# Allegro board fpga_board.brd
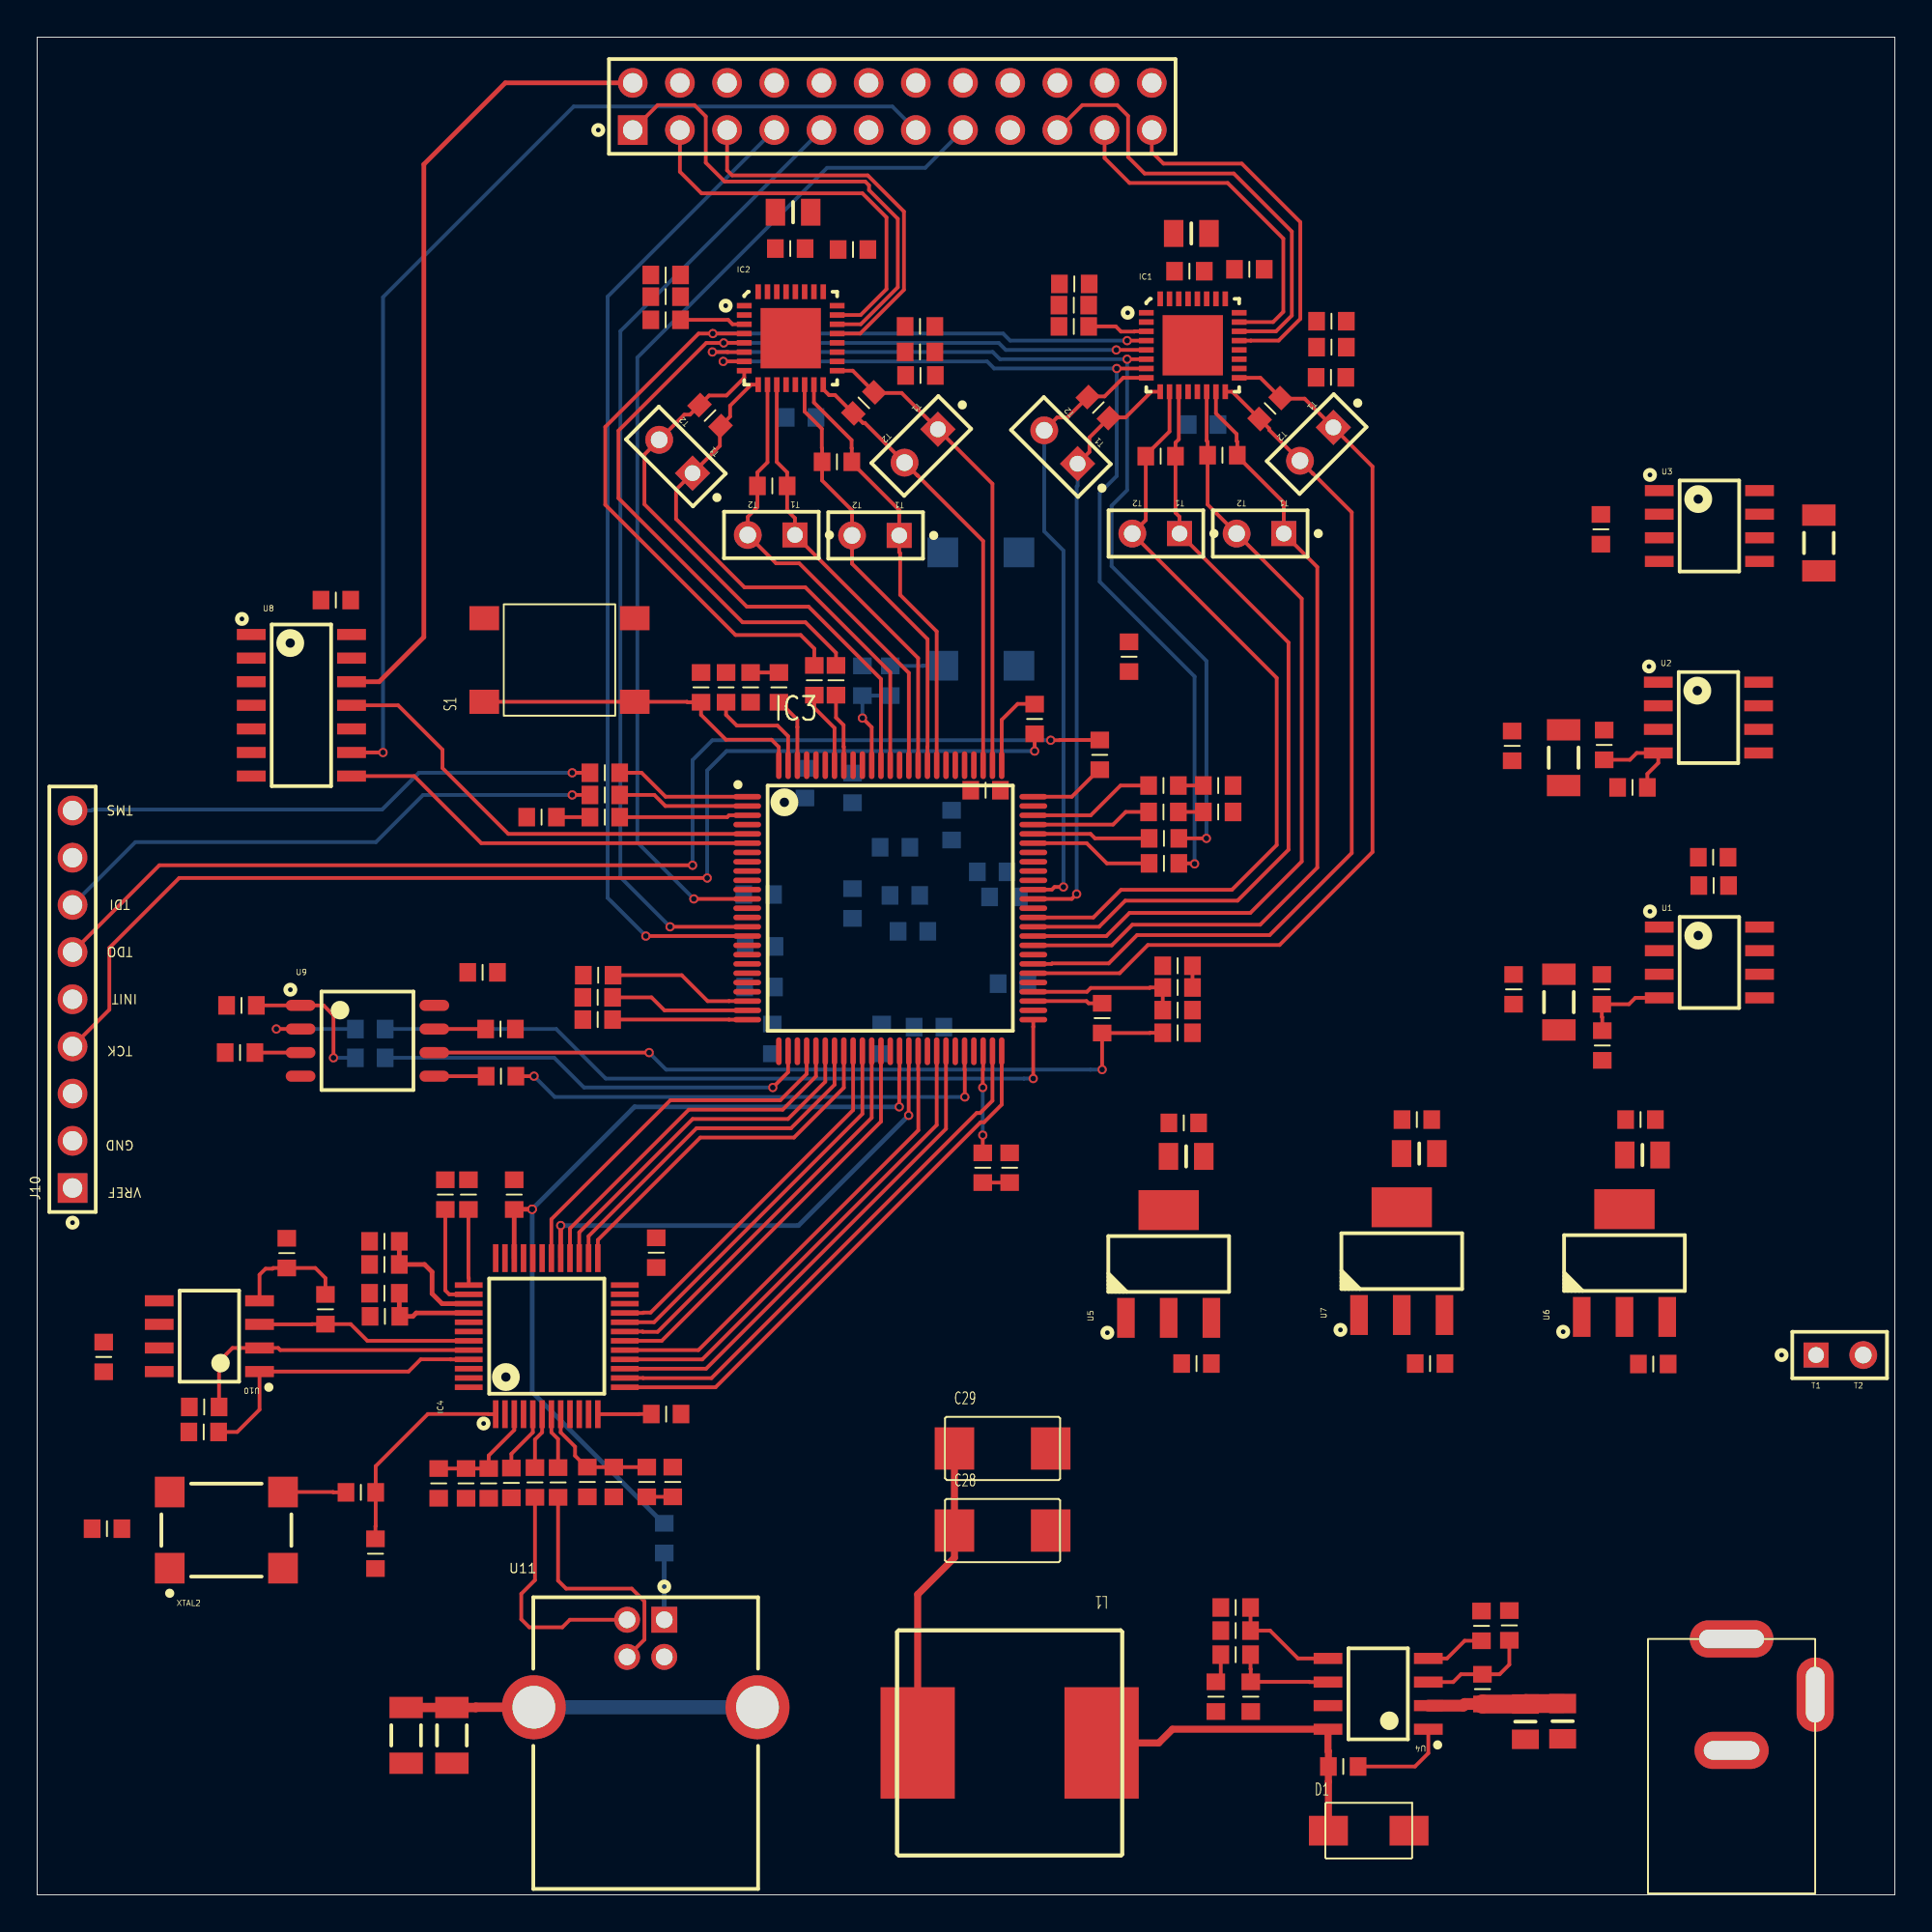
[diagram p0: board, top side]
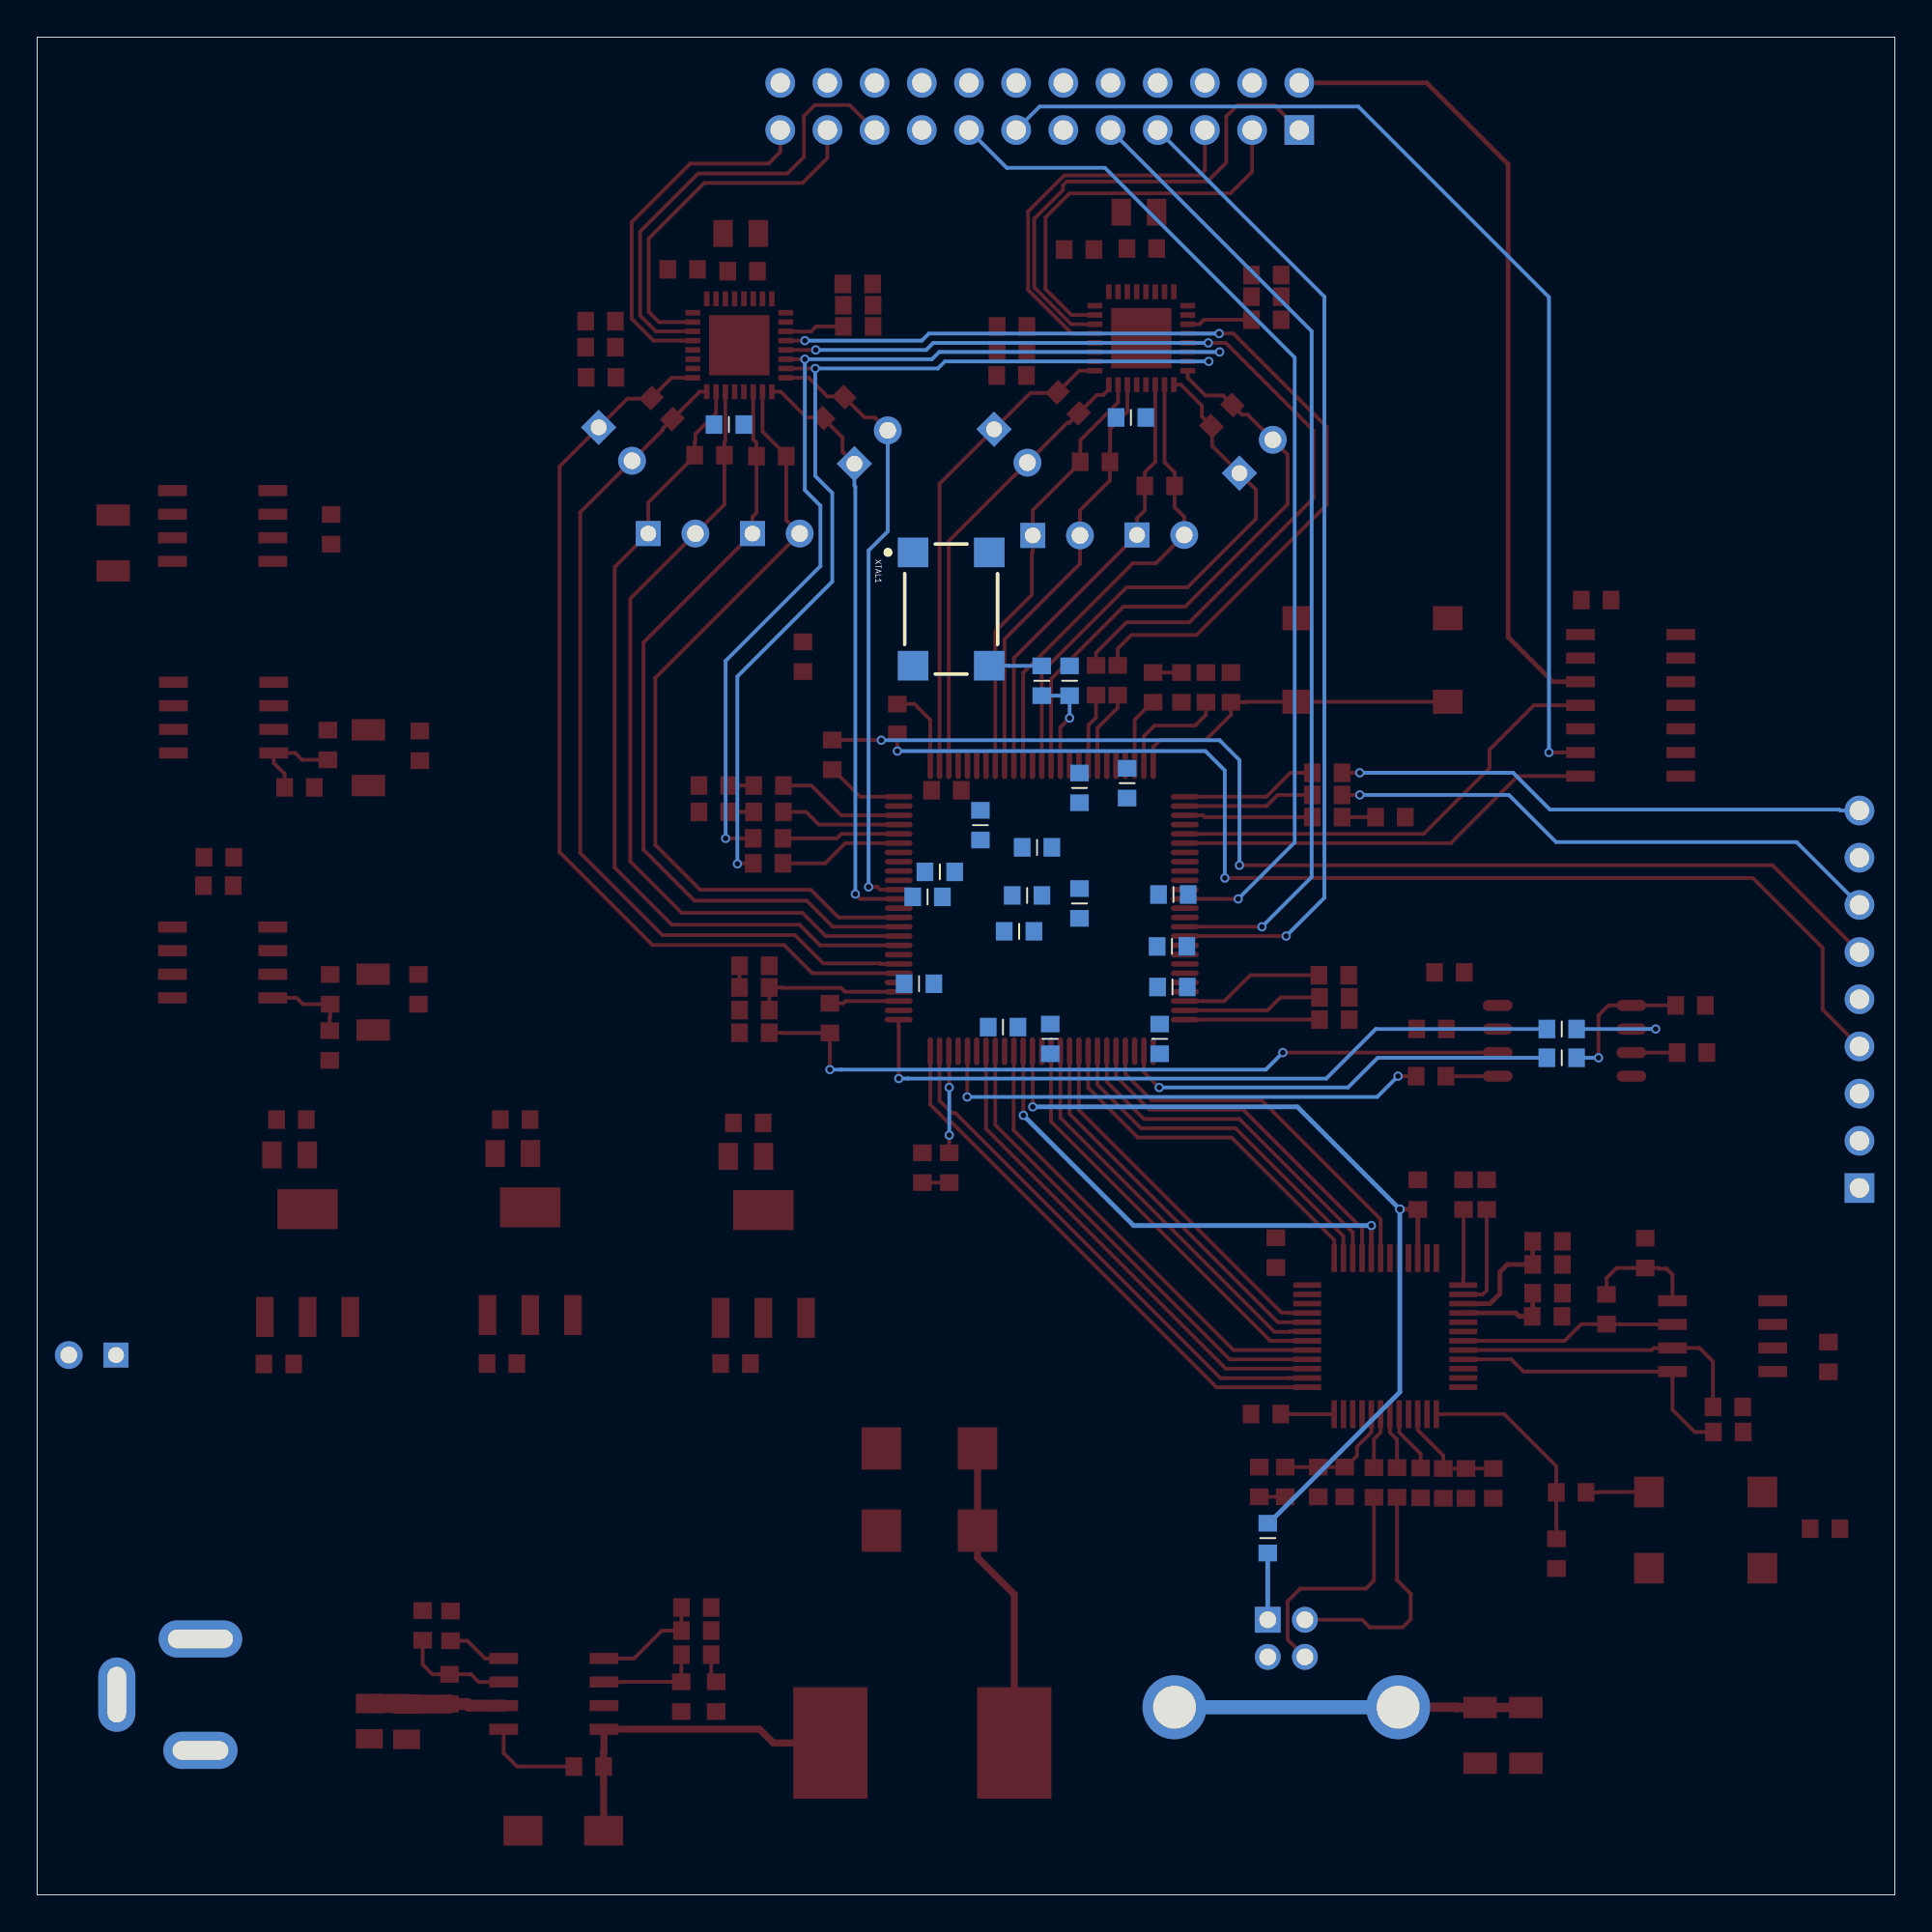
[diagram p1: board, bottom side, seen from below]

Outline 100 x 100 mm; copper layers: TOP, BOTTOM. Coordinates in mm from the lower left corner of the outline.
Outline path: 0,100 0,0 100,0 100,100 0,100

## Design rules (mm)
nets with their own width: min track width 0.254; nets VCC1V2 VCC1V8 VCC3V3 VCC5 VCC5A VCC7A VCC12 VREF4

## Placement (name value [footprint] x y rotation side)
C1  10uF  [0805]  62.13 89.43 0 top
C2  0.1uF  [0603]  62.03 87.4 0 top
C3  0.1uF  [0603]  65.25 87.5 0 top
C4  0.1uF  [0603]  55.83 86.72 0 top
C5  0.1uF  [0603]  55.8 85.57 0 top
C6  0.1uF  [0603]  69.67 84.71 180 top
C7  0.1uF  [0603]  69.67 83.31 180 top
C8  0.1uF  [0603]  69.65 81.69 0 top
C9  0.1uF  [0603]  62.76 79.15 0 bottom
C10  10uF  [0805]  40.69 90.58 0 top
C11  0.1uF  [0603]  40.54 88.62 0 top
C12  0.1uF  [0603]  43.92 88.57 0 top
C13  0.1uF  [0603]  33.83 87.2 0 top
C14  0.1uF  [0603]  33.83 86.03 0 top
C15  0.1uF  [0603]  47.52 84.43 180 top
C16  0.1uF  [0603]  47.52 83.06 180 top
C17  0.1uF  [0603]  47.55 81.79 0 top
C18  0.1uF  [0603]  41.12 79.53 0 bottom
C19  100pF  [0603]  90.22 55.85 180 top
C20  0.1uF  [0603]  90.25 54.33 180 top
C21  22uF  [1206]  81.92 48.06 270 top
C22  0.1uF  [0603]  79.48 48.74 270 top
C23  22uF  [1206]  82.17 61.21 270 top
C24  1uF  [0603]  79.4 61.85 270 top
C25  0.1uF  [0603]  84.18 73.51 270 top
C26  22uF  [1206]  95.91 72.77 270 top
C27  0.1uF  [0603]  70.31 6.91 180 top
C28  100uF  [6032]  51.97 19.61 0 top
C29  100uF  [6032]  51.97 24.03 0 top
C30  10uF  [0805]  80.11 9.32 270 top
C31  10uF  [0805]  82.12 9.35 270 top
C32  68pF  [0603]  65.33 10.67 270 top
C33  2.2nF  [0603]  64.52 12.93 180 top
C34  0.1uF  [0603]  77.75 14.48 90 top
C35  0.1uF  [0603]  62.41 28.6 180 top
C36  0.1uF  [0603]  87 28.57 180 top
C37  10uF  [0805]  61.85 39.75 0 top
C38  100uF  [0603]  61.72 41.55 0 top
C39  10uF  [0805]  86.41 39.83 0 top
C40  100uF  [0603]  86.31 41.73 0 top
C41  0.1uF  [0603]  74.98 28.6 180 top
C42  10uF  [0805]  74.4 39.9 0 top
C43  100uF  [0603]  74.27 41.73 0 top
C44  0.1uF  [0603]  16.08 69.7 180 top
C45  0.1uF  [0603]  44.42 65.35 90 bottom
C46  0.1uF  [0603]  58.78 66.65 90 top
C47  0.1uF  [0603]  23.98 49.66 0 top
C48  0.1uF  [0603]  38.84 53.85 180 bottom
C49  0.1uF  [0603]  39.57 46.08 270 bottom
C50  0.1uF  [0603]  48.01 46.71 180 bottom
C51  4.7uF  [0603]  43.89 53.37 270 bottom
C52  0.1uF  [0603]  51.41 55.07 180 bottom
C53  0.1uF  [0603]  51.05 59.46 0 top
C54  0.1uF  [0603]  41.33 59.84 90 bottom
C55  4.7uF  [0603]  46.71 53.8 180 bottom
C56  0.1uF  [0603]  38.89 48.87 180 bottom
C57  0.1uF  [0603]  52.53 49.05 180 bottom
C58  0.1uF  [0603]  43.89 59.59 270 bottom
C59  4.7uF  [0603]  46.18 56.39 180 bottom
C60  0.1uF  [0603]  38.91 51.05 180 bottom
C61  0.1uF  [0603]  45.47 46.08 270 bottom
C62  0.1uF  [0603]  52.07 53.72 0 bottom
C63  0.1uF  [0603]  49.23 57.58 270 bottom
C64  4.7uF  [0603]  47.14 51.87 180 bottom
C65  0.1uF  [0603]  3.58 28.96 270 top
C66  0.1uF  [0603]  29.62 22.23 270 top
C67  4.7uF  [0603]  31.04 22.23 270 top
C68  4.7uF  [0603]  24.31 22.15 270 top
C69  0.1uF  [0603]  23.09 22.15 270 top
C70  0.1uF  [0603]  33.86 25.88 0 top
C71  0.1uF  [0603]  33.32 34.57 90 top
C72  0.1uF  [0603]  34.21 22.23 90 top
C73  4.7uF  [0603]  18.72 31.14 180 top
C74  0.1uF  [0603]  18.69 32.38 180 top
C75  4.7uF  [0603]  18.69 33.93 180 top
C76  0.1uF  [0603]  18.69 35.18 180 top
C77  0.1uF  [0603]  23.22 37.69 90 top
C78  0.1uF  [0603]  21.97 37.69 90 top
C79  100nF  [1206]  19.86 8.59 90 top
C80  0.1uF  [0603]  18.21 18.36 270 top
C81  0.1uF  [0603]  3.76 19.71 180 top
D1  DIODE  [SMA]  71.68 3.45 0 top
D2  DIODE  [0603]  39.93 65 90 top
D3  DIODE  [0603]  60.63 59.72 0 top
D4  DIODE  [0603]  60.63 58.29 0 top
D5  DIODE  [0603]  30.56 58.01 180 top
D6  LED  [0603]  50.9 39.14 270 top
D7  LED  [0603]  61.39 50.01 0 top
IC1  ad7961  [AD7961]  62.2 83.41 0 top
IC2  ad7961  [AD7961]  40.56 83.79 0 top
IC3  XC3S200A-VQ100  [XCS200A]  45.92 53.11 0 top
IC4  ft232h  [FT232H]  27.43 30.07 90 top
J1  header1  [P12]  69.77 78.99 225 top
J2  header1  [P12]  56.01 77.04 135 top
J3  header1  [P12]  61.49 73.28 180 top
J4  header1  [P12]  67.11 73.28 180 top
J5  header1  [P12]  48.49 78.89 225 top
J6  header1  [P12]  35.28 76.53 135 top
J7  header1  [P12]  40.79 73.2 180 top
J8  p2l12  [P2L12]  32.06 95 0 top
J9  header1  [P12]  46.41 73.18 180 top
J10  jtag  [JTAG]  1.91 38.05 90 top
J11  header1  [P12]  95.76 29.06 0 top
L1  6.8uH  [INDU127]  52.35 8.18 180 top
L2  600mOhm  [0603]  32.82 22.23 90 top
L3  600mOhm  [0603]  21.62 22.15 90 top
P1  dc12  [DC12]  91.21 0.08 90 top
R1  0R  [0603]  55.8 84.43 180 top
R2  100R  [0603]  66.37 80.01 225 top
R3  100R  [0603]  57.12 80.06 315 top
R4  100R  [0603]  60.48 77.44 0 top
R5  100R  [0603]  63.8 77.5 0 top
R6  0R  [0603]  33.83 84.79 180 top
R7  100  [0603]  44.5 80.31 225 top
R8  100R  [0603]  36.22 79.63 315 top
R9  100R  [0603]  39.57 75.84 0 top
R10  100R  [0603]  43.05 77.14 0 top
R11  2.16K  [0603]  84.23 48.74 270 top
R12  3.3K  [0603]  84.35 61.9 270 top
R13  10K  [0603]  84.25 45.72 270 top
R14  10K  [0603]  85.88 59.61 180 top
R15  348K  [0603]  77.8 11.07 90 top
R16  10K  [0603]  64.52 15.47 0 top
R17  15K  [0603]  63.45 10.67 270 top
R18  76.8K  [0603]  79.25 14.5 90 top
R19  1.87K  [0603]  64.52 14.22 180 top
R20  1K  [0603]  38.4 65 90 top
R21  1K  [0603]  63.58 59.72 180 top
R22  1K  [0603]  63.58 58.29 180 top
R23  0R  [0603]  41.83 65.38 90 top
R24  0R  [0603]  60.66 56.87 0 top
R25  0R  [0603]  43 65.38 90 top
R26  0R  [0603]  60.66 55.52 0 top
R27  1K  [0603]  27.15 58.01 0 top
R28  R  [0603]  45.92 65.35 270 bottom
R29  10K  [0603]  30.2 49.5 0 top
R30  10K  [0603]  30.18 48.31 0 top
R31  10K  [0603]  30.18 47.12 0 top
R32  10K  [0603]  10.92 45.34 0 top
R33  10K  [0603]  11 47.88 0 top
R34  10K  [0603]  24.94 46.61 0 top
R35  33R  [0603]  17.93 45.06 180 bottom
R36  33R  [0603]  24.97 44.07 180 top
R37  4.7K  [0603]  61.39 46.41 180 top
R38  4.7K  [0603]  35.74 65 270 top
R39  4.7K  [0603]  61.39 47.62 180 top
R40  33R  [0603]  57.33 47.19 90 top
R41  1K  [0603]  30.56 60.4 0 top
R42  1K  [0603]  30.56 59.21 0 top
R43  1K  [0603]  57.2 61.37 270 top
R44  33R  [0603]  17.93 46.61 180 bottom
R45  1K  [0603]  53.7 63.3 270 top
R46  390  [0603]  37.08 65 90 top
R47  390  [0603]  52.35 39.14 270 top
R48  390  [0603]  61.39 48.84 0 top
R49  10K  [0603]  8.97 24.92 0 top
R50  10K  [0603]  8.99 26.26 0 top
R51  10K  [0603]  15.52 31.52 90 top
R52  10K  [0603]  13.44 34.54 270 top
R53  33R  [0603]  26.8 22.2 90 top
R54  4.7K  [0603]  33.76 19.2 90 bottom
R55  33R  [0603]  28.04 22.2 90 top
R56  12K  [0603]  25.53 22.17 90 top
R57  1MEG  [1206]  22.33 8.59 90 top
R58  10K  [0603]  25.68 37.69 270 top
R59  R  [0603]  17.42 21.67 0 top
S1  switch  [SWITCH2]  28.12 66.47 90 top
U1  mic5209bm  [SOIC127P600X175-8N]  90.02 50.19 0 top
U2  mic5209bm  [SOIC127P600X175-8N]  89.97 63.37 0 top
U3  ref5040  [SOIC127P600X175-8N]  90.02 73.69 0 top
U4  tps54331  [SOIC127P600X175-8N]  72.19 10.82 180 top
U5  ams1117  [AMS1117]  60.91 33.96 90 top
U6  ams1117  [AMS1117]  85.45 34.01 90 top
U7  ams1117  [AMS1117]  73.46 34.11 90 top
U8  74lvc125  [74LVC125]  14.22 64.03 0 top
U9  m25p80  [M25P80]  17.78 45.97 0 top
U10  93c46  [SOIC127P600X175-8N]  9.27 30.07 180 top
U11  usb-b  [USB-B]  33.76 14.81 0 top
XTAL1  co4305  [CO4305]  50.8 69.22 180 bottom
XTAL2  co4305  [CO4305]  10.19 19.63 90 top

## Library data of the parts
C1 C10 = CAP
C2-C9 C11-C29 C32-C36 C38 C40 C41 C43-C81 = CAPACITOR NON-POL
C30 C31 C37 C39 C42 = CAP POL
D1-D5 = DIODE
D6 D7 = LED
IC1 IC2 = ad7961
IC3 = XC3S200A-VQ100
IC4 = ft232h
J1-J7 J9 J11 = header1
J8 = p2l12
J10 = JTAG
L1-L3 = INDUCTOR
P1 = dc12
R1-R59 = R
S1 = switch
U1 U2 = mic5209bm
U3 = ref5040
U4 = tps54331
U5-U7 = ams1117
U8 = 74lvc125
U9 = m25p80
U10 = 93c46
U11 = usb-b
XTAL1 XTAL2 = co4305

## Footprints (pads in the part's own frame, mm; a bottom-side part is the same pattern mirrored in y, then rotated)
74LVC125
  rect 1.55x0.6 smd: 1(-2.7,3.81) 2(-2.7,2.54) 3(-2.7,1.27) 4(-2.7,0) 5(-2.7,-1.27) 6(-2.7,-2.54) 7(-2.7,-3.81) 8(2.7,-3.81) 9(2.7,-2.54) 10(2.7,-1.27) 11(2.7,0) 12(2.7,1.27) 13(2.7,2.54) 14(2.7,3.81)
0603
  rect 0.9x1 smd: 1(-0.8,0) 2(0.8,0)
0805
  rect 1.05x1.45 smd: 1(-0.95,0) 2(0.95,0)
1206
  rect 1.15x1.8 smd: 1(-1.5,0) 2(1.5,0)
6032
  rect 2.13x2.28 smd: 1(-2.59,0) 2(2.59,0)
AD7961
  rect 0.8x0.3 smd: 1(-2.5,1.75) 2(-2.5,1.25) 3(-2.5,0.75) 4(-2.5,0.25) 5(-2.5,-0.25) 6(-2.5,-0.75) 7(-2.5,-1.25) 8(-2.5,-1.75) 17(2.5,-1.75) 18(2.5,-1.25) 19(2.5,-0.75) 20(2.5,-0.25) 21(2.5,0.25) 22(2.5,0.75) 23(2.5,1.25) 24(2.5,1.75)
  rect 0.3x0.8 smd: 9(-1.75,-2.5) 10(-1.25,-2.5) 11(-0.75,-2.5) 12(-0.25,-2.5) 13(0.25,-2.5) 14(0.75,-2.5) 15(1.25,-2.5) 16(1.75,-2.5) 25(1.75,2.5) 26(1.25,2.5) 27(0.75,2.5) 28(0.25,2.5) 29(-0.25,2.5) 30(-0.75,2.5) 31(-1.25,2.5) 32(-1.75,2.5)
  rect 3.25x3.25 smd: 33(0,0)
AMS1117
  rect 2.15x0.95 smd: 1(-2.9,2.3) 2(-2.9,0) 3(-2.9,-2.3)
  rect 2.15x3.25 smd: 4(2.9,0)
CO4305
  rect 1.65x1.6 smd: 1(-2.05,3.05) 2(-2.05,-3.05) 3(2.05,-3.05) 4(2.05,3.05)
DC12
  oval 2x4.5 hole 1x3.5: 1(13.7,0)
  oval 2x4 hole 1x3: 2(7.7,0)
  oval 4x2 hole 3x1: 3(10.7,-4.5)
FT232H
  rect 1.5x0.3 smd: 1(-4.2,2.75) 2(-4.2,2.25) 3(-4.2,1.75) 4(-4.2,1.25) 5(-4.2,0.75) 6(-4.2,0.25) 7(-4.2,-0.25) 8(-4.2,-0.75) 9(-4.2,-1.25) 10(-4.2,-1.75) 11(-4.2,-2.25) 12(-4.2,-2.75) 25(4.2,-2.75) 26(4.2,-2.25) 27(4.2,-1.75) 28(4.2,-1.25) 29(4.2,-0.75) 30(4.2,-0.25) 31(4.2,0.25) 32(4.2,0.75) 33(4.2,1.25) 34(4.2,1.75) 35(4.2,2.25) 36(4.2,2.75)
  rect 0.3x1.5 smd: 13(-2.75,-4.2) 14(-2.25,-4.2) 15(-1.75,-4.2) 16(-1.25,-4.2) 17(-0.75,-4.2) 18(-0.25,-4.2) 19(0.25,-4.2) 20(0.75,-4.2) 21(1.25,-4.2) 22(1.75,-4.2) 23(2.25,-4.2) 24(2.75,-4.2) 37(2.75,4.2) 38(2.25,4.2) 39(1.75,4.2) 40(1.25,4.2) 41(0.75,4.2) 42(0.25,4.2) 43(-0.25,4.2) 44(-0.75,4.2) 45(-1.25,4.2) 46(-1.75,4.2) 47(-2.25,4.2) 48(-2.75,4.2)
INDU127
  rect 4x6 smd: 1(-4.95,0) 2(4.95,0)
JTAG
  rect 1.6x1.6 hole 1.05: 1(0,0)
  round 1.6 hole 1.05: 2(2.54,0) 3(5.08,0) 4(7.62,0) 5(10.16,0) 6(12.7,0) 7(15.24,0) 8(17.78,0) 9(20.32,0)
M25P80
  oval 1.6x0.6 smd: 1(-3.6,1.905) 2(-3.6,0.635) 3(-3.6,-0.635) 4(-3.6,-1.905) 5(3.6,-1.905) 6(3.6,-0.635) 7(3.6,0.635) 8(3.6,1.905)
P2L12
  rect 1.6x1.6 hole 1.05: 1(0,0)
  round 1.6 hole 1.05: 2(0,2.54) 3(2.54,0) 4(2.54,2.54) 5(5.08,0) 6(5.08,2.54) 7(7.62,0) 8(7.62,2.54) 9(10.16,0) 10(10.16,2.54) 11(12.7,0) 12(12.7,2.54) 13(15.24,0) 14(15.24,2.54) 15(17.78,0) 16(17.78,2.54) 17(20.32,0) 18(20.32,2.54) 19(22.86,0) 20(22.86,2.54) 21(25.4,0) 22(25.4,2.54) 23(27.94,0) 24(27.94,2.54)
P12
  rect 1.35x1.35 hole 0.85: 1(0,0)
  round 1.5 hole 0.9: 2(2.54,0)
SMA
  rect 2.1x1.6 smd: 1(-2.17,0) 2(2.17,0)
SOIC127P600X175-8N
  rect 1.55x0.6 smd: 1(-2.7,1.905) 2(-2.7,0.635) 3(-2.7,-0.635) 4(-2.7,-1.905) 5(2.7,-1.905) 6(2.7,-0.635) 7(2.7,0.635) 8(2.7,1.905)
SWITCH2
  rect 1.3x1.6 smd: 1(-2.25,4.05) 2(2.25,4.05) 3(-2.25,-4.05) 4(2.25,-4.05)
USB-B
  rect 1.4x1.4 hole 0.9: 1(0,0)
  round 1.4 hole 0.9: 2(-2,0) 3(-2,-2) 4(0,-2)
  round 3.45 hole 2.3: M1(-7.02,-4.71) M2(5.02,-4.71)
XCS200A
  oval 1.5x0.3 smd: 1(-7.7,6) 2(-7.7,5.5) 3(-7.7,5) 4(-7.7,4.5) 5(-7.7,4) 6(-7.7,3.5) 7(-7.7,3) 8(-7.7,2.5) 9(-7.7,2) 10(-7.7,1.5) 11(-7.7,1) 12(-7.7,0.5) 13(-7.7,0) 14(-7.7,-0.5) 15(-7.7,-1) 16(-7.7,-1.5) 17(-7.7,-2) 18(-7.7,-2.5) 19(-7.7,-3) 20(-7.7,-3.5) 21(-7.7,-4) 22(-7.7,-4.5) 23(-7.7,-5) 24(-7.7,-5.5) 25(-7.7,-6) 51(7.7,-6) 52(7.7,-5.5) 53(7.7,-5) 54(7.7,-4.5) 55(7.7,-4) 56(7.7,-3.5) 57(7.7,-3) 58(7.7,-2.5) 59(7.7,-2) 60(7.7,-1.5) 61(7.7,-1) 62(7.7,-0.5) 63(7.7,0) 64(7.7,0.5) 65(7.7,1) 66(7.7,1.5) 67(7.7,2) 68(7.7,2.5) 69(7.7,3) 70(7.7,3.5) 71(7.7,4) 72(7.7,4.5) 73(7.7,5) 74(7.7,5.5) 75(7.7,6)
  oval 0.3x1.5 smd: 26(-6,-7.7) 27(-5.5,-7.7) 28(-5,-7.7) 29(-4.5,-7.7) 30(-4,-7.7) 31(-3.5,-7.7) 32(-3,-7.7) 33(-2.5,-7.7) 34(-2,-7.7) 35(-1.5,-7.7) 36(-1,-7.7) 37(-0.5,-7.7) 38(0,-7.7) 39(0.5,-7.7) 40(1,-7.7) 41(1.5,-7.7) 42(2,-7.7) 43(2.5,-7.7) 44(3,-7.7) 45(3.5,-7.7) 46(4,-7.7) 47(4.5,-7.7) 48(5,-7.7) 49(5.5,-7.7) 50(6,-7.7) 76(6,7.7) 77(5.5,7.7) 78(5,7.7) 79(4.5,7.7) 80(4,7.7) 81(3.5,7.7) 82(3,7.7) 83(2.5,7.7) 84(2,7.7) 85(1.5,7.7) 86(1,7.7) 87(0.5,7.7) 88(0,7.7) 89(-0.5,7.7) 90(-1,7.7) 91(-1.5,7.7) 92(-2,7.7) 93(-2.5,7.7) 94(-3,7.7) 95(-3.5,7.7) 96(-4,7.7) 97(-4.5,7.7) 98(-5,7.7) 99(-5.5,7.7) 100(-6,7.7)

## Nets
0VCM: IC1.21(VCM) J8.23
1VCM: IC2.21(VCM) J8.5
GND: C1.2 C2.2 C3.2 C4.1 C5.1 C6.1 C7.1 C8.2 C9.2 C10.2 C11.2 C12.2 C13.1 C14.1 C15.1 C16.1 C17.2 C18.2 C19.1 C20.1 C21.2 C22.2 C23.2 C24.2 C25.2 C26.2 C28.2 C29.2 C30.2 C31.2 C32.2 C34.2 C35.2 C36.2 C37.2 C38.2 C39.2 C40.2 C41.2 C42.2 C43.2 C44.2 C45.2 C46.2 C47.2 C48.2 C49.2 C50.2 C51.2 C52.2 C53.2 C54.2 C55.2 C56.2 C57.2 C58.2 C59.2 C60.2 C61.2 C62.2 C63.2 C64.2 C65.1 C66.2 C67.2 C68.2 C69.2 C70.2 C71.2 C72.2 C73.2 C74.2 C75.2 C76.2 C77.2 C78.2 C79.1 C80.2 C81.2 D1.2(A) D7.1(CATHODE) IC1.13(GND1) IC1.24(GND2) IC1.26(REF_GND1) IC1.27(REF_GND2) IC1.28(REF_GND3) IC1.33(GND) IC2.13(GND1) IC2.24(GND2) IC2.26(REF_GND1) IC2.27(REF_GND2) IC2.28(REF_GND3) IC2.33(GND) IC3.8(GND1) IC3.14(GND2) IC3.18(GND3) IC3.42(GND4) IC3.47(GND5) IC3.58(GND6) IC3.63(GND7) IC3.69(GND8) IC3.74(GND9) IC3.80(GND10) IC3.87(GND11) IC3.91(GND12) IC3.95(GND13) IC4.4(AGND1) IC4.9(AGND2) IC4.10(AGND4) IC4.11(GND1) IC4.22(GND2) IC4.23(GND3) IC4.35(GND4) IC4.36(GND5) IC4.41(AGND3) IC4.42(TEST) IC4.47(GND6) IC4.48(GND7) J8.4 J8.6 J8.8 J8.10 J8.11 J8.12 J8.14 J8.16 J8.17 J8.18 J8.20 J8.22 J8.24 J10.2 P1.2 P1.3 R1.2 R6.2 R13.2 R14.2 R17.2 R18.2 R19.2 R29.1 R30.1 R46.2 R56.1 R57.1 R58.1 S1.2 S1.4 U1.5(GND1) U1.6(GND2) U1.7(GND3) U1.8(GND4) U2.5(GND1) U2.6(GND2) U2.7(GND3) U2.8(GND4) U3.4(GND) U4.7(GND) U5.1(GND) U6.1(GND) U7.1(GND) U8.10(3O\E\) U8.13(4O\E\) U9.4(VSS) U10.5(VSS) U11.4(GND) XTAL1.2(GND) XTAL2.2(GND)
VCC1V2: C42.1 C43.1 C60.1 C61.1 C62.1 C63.1 C64.1 IC3.17(VCCINT_3) IC3.38(VCCINT_2) IC3.66(VCCINT_1) IC3.81(VCCINT_0) U7.2(VOUT) U7.4(TAB)
VCC1V8: C3.1 C5.2 C8.1 C9.1 C12.1 C14.2 C17.1 C18.1 C39.1 C40.1 C52.1 C53.1 C54.1 C55.1 IC1.2(VDD21) IC1.12(VIO) IC1.18(VDD22) IC1.25(VDD23) IC2.2(VDD21) IC2.12(VIO) IC2.18(VDD22) IC2.25(VDD23) IC3.67(VCCO_1) IC3.79(VCCO_01) IC3.96(VCCO_02) R20.1 R21.1 R22.1 R27.1 U6.2(VOUT) U6.4(TAB)
VCC3V3: C37.1 C38.1 C44.1 C46.1 C47.1 C48.1 C49.1 C50.1 C51.1 C56.1 C57.1 C58.1 C59.1 C65.2 C70.1 C71.1 C72.1 C73.1 C74.1 C75.1 C76.1 C81.1 IC3.11(VCCO_3) IC3.22(VCCAUX_3) IC3.26(VCCO_21) IC3.45(VCCO_22) IC3.55(VCCAUX_1) IC3.92(VCCAUX_0) IC4.12(VCCIO1) IC4.24(VCCIO2) IC4.39(VCCD) IC4.40(VREGIN) IC4.46(VCCIO3) J10.1 L2.1 L3.1 R31.1 R32.1 R33.1 R34.2 R37.1 R38.1 R39.1 R47.1 R49.1 R50.1 R52.1 U5.2(VOUT) U5.4(TAB) U8.14(VCC) U9.8(VCC) U10.6(ORG) U10.8(VCC) XTAL1.1(E/D) XTAL1.4(VDD) XTAL2.1(E/D) XTAL2.4(VDD)
VCC5: C28.1 C29.1 C35.1 C36.1 C41.1 L1.2 R16.1 U5.3(VIN) U6.3(VIN) U7.3(VIN)
VCC5A: C4.2 C6.2 C7.2 C13.2 C15.2 C16.2 C23.1 C24.1 IC1.1(VDD11) IC1.19(VDD12) IC1.20(VDD13) IC2.1(VDD11) IC2.19(VDD12) IC2.20(VDD13) R12.1 U2.3(OUT)
VCC7A: C21.1 C22.1 C25.1 R11.1 U1.3(OUT) U2.1(EN) U2.2(IN) U3.2(VIN)
VCC12: C19.2 C20.2 C30.1 C31.1 J11.1 J11.2 P1.1 R15.1 U1.1(EN) U1.2(IN) U4.2(VIN)
0AD_IN+: IC1.23(IN+) J8.21
0AD_IN-: IC1.22(IN-) J8.19
0CLK+: IC1.17(CLK+) IC3.56(IO_L01P_1) J1.1 R2.1
0CLK-: IC1.16(CLK-) IC3.57(IO_L01N_1) J1.2 R2.2
0CNV+: IC1.9(CNV+) IC3.64(IO_L04P_1/IRDY1/RHCLK6) J2.1 R3.2
0CNV-: IC1.8(CNV-) IC3.65(IO_L04N_1/RHCLK7) J2.2 R3.1
0D+: IC1.11(D+) IC3.61(IO_L03P_1/RHCLK2) J3.1 R4.2
0D-: IC1.10(D-) IC3.62(IO_L03N/TRDY1/RHCLK3) J3.2 R4.1
0DCO+: IC1.15(DCO+) IC3.59(IO_L02P_1/RHCLK0) J4.1 R5.2
0DCO-: IC1.14(DCO-) IC3.60(IO_L02N_1RHCLK1) J4.2 R5.1
1AD_IN+: IC2.23(IN+) J8.3
1AD_IN-: IC2.22(IN-) J8.1
1CLK+: IC2.17(CLK+) IC3.77(IO_L01P_0/VREF_0) J5.1 R7.1
1CLK-: IC2.16(CLK-) IC3.78(IO_L01N_0) J5.2 R7.2
1CNV+: IC2.9(CNV+) IC3.88(IO_L04P_0/GCLK8) J6.1 R8.2
1CNV-: IC2.8(CNV-) IC3.89(IO_L04N_0/GCLK9) J6.2 R8.1
1D+: IC2.11(D+) IC3.85(IO_L03P_0/GCLK6) J7.1 R9.2
1D-: IC2.10(D-) IC3.86(IO_L03N_0/GCLK7) J7.2 R9.1
1DCO+: IC2.15(DCO+) IC3.83(IO_L02P_0/GCLK4) J9.1 R10.2
1DCO-: IC2.14(DCO-) IC3.84(IO_L02N_0/GCLK5) J9.2 R10.1
CCLK: IC3.53(IO_L12N_2/CCLK) R40.2
CF_IN: IC3.16(IO_L05N_3/LHCLK7) J8.7
CLK_IN: IC3.12(IO_L04P_3/LHCLK2) J8.15
CLKOUT#: IC3.40(IO_L08P_2GCLK14) IC4.29(ACBUS5)
D0: IC3.50(IO_L01P_2/D2) IC4.13(ADBUS0)
D1: IC3.49(IO_L01N_2/D3) IC4.14(ADBUS1)
D2: IC3.44(IO_L09N_2/GCLK1) IC4.15(ADBUS2)
D3: IC3.43(IO_L09P_2/GCLK0) IC4.16(ADBUS3)
D4: IC3.41(IO_L08N_2/GCLK15) IC4.17(ADBUS4)
D5: IC3.37(IO_L07P_2/D4) IC4.18(ADBUS5)
D6: IC3.36(IO_L07P_2/D5) IC4.19(ADBUS6)
D7: IC3.35(IO_L06N_2/D6) IC4.20(ADBUS7)
DONE: IC3.54(DONE) R39.2 R48.1
EECLK: IC4.44(EECLK) R50.2 U10.2(CLK)
EECS: IC4.45(EECS) R49.2 U10.1(CS)
EEDATA: IC4.43(EEDATA) R51.1 U10.3(DI)
EN0: IC1.4(EN0) IC2.4(EN0) R23.2
EN1: IC1.5(EN1) IC2.5(EN1) R25.2
EN2: IC1.6(EN2) IC2.6(EN2) R24.2
EN3: IC1.7(EN3) IC2.7(EN3) R26.2
FT_RST: IC3.39(IP_2/VREF_2) IC4.34(R\E\S\E\T\) R54.2 R58.2
INIT: J10.5
INIT_B: D6.1(CATHODE) IC3.48(IO_L10P_2/INIT_B)
M0: IC3.25(IO_L01N_2/M0) R31.2
M1: IC3.24(IO_L02P_2/M2) R30.2
M2: IC3.23(IO_L01P_2M1) R29.2
MISO: IC3.51(IO_L12P_2/D0/DIN/MISO) R44.1
PROG_B: IC3.100(PRO_B) R38.2 S1.1 S1.3
PWRSAV#: IC3.29(IO_L03N_2/VS2) IC4.30(ACBUS6)
RD#: IC3.32(IO_L05P_2) IC4.26(ACBUS2)
REFIN0: IC1.3(REFIN) R1.1
REFIN1: IC2.3(REFIN) R6.1
RST_IN: IC3.15(IO_L05P_3/TRDY2/LHCLK6) J8.9
RXF#: IC3.34(IO_L06P_2/D7) IC4.21(ACBUS0)
SIWU#: IC3.30(IO_L04P_2/VS1) IC4.28(ACBUS4)
TCK: J10.4 R45.2
TDI: J10.7 R42.1
TDO: J10.6 R43.1
TMS: J10.9 R41.1
TRIG0_FPGA: IC3.6(IO_L02N_3) U8.8(3Y)
TRIG0_OUT: J8.13 U8.9(3A)
TRIG1_FPGA: IC3.5(IO_L02P_3) U8.11(4Y)
TRIG1_OUT: J8.2 U8.12(4A)
TXE#: IC3.33(IO_L05N_2) IC4.25(ACBUS1)
VREF4: C1.1 C2.1 C10.1 C11.1 C26.1 IC1.29(REF1) IC1.30(REF2) IC1.31(REF3) IC1.32(REF4) IC2.29(REF1) IC2.30(REF2) IC2.31(REF3) IC2.32(REF4) U3.7(VOUT)
WR#: IC3.31(IO_L04N_2/VS0) IC4.27(ACBUS3)
XTAIL2_OUT: C45.1 IC3.90(IO_0/GCLK11) R28.2
N07006: C66.1 C67.1 IC4.8(VPLL) L2.2
N07019: C68.1 C69.1 IC4.3(VPHY) L3.2
N07539: C78.1 IC4.38(VCCORE)
N07557: C77.1 IC4.37(VCCA)
N09249: IC4.6(DM) R53.2
N09253: IC4.7(DP) R55.2
N09257: R53.1 U11.2(D-)
N09261: R55.1 U11.3(D+)
N09333: C79.2 R57.2 U11.M1 U11.M2
N09549: IC4.5(REF) R56.2
N10001: R59.1 XTAL2.3(OUT)
N10014: C80.1 IC4.1(XCSI) R59.2
N10649: R51.2 R52.2 U10.4(DO)
N14805: R11.2 R13.1 U1.4(ADJ)
N15646: R12.2 R14.1 U2.4(ADJ)
N16666: R15.2 R18.1 U4.3(EN)
N16724: C27.1 U4.1(BOOT)
N16752: C27.2 D1.1(K) L1.1 U4.8(PH)
N17090: C32.1 C33.1 U4.6(COMP)
N17111: C33.2 R17.1
N17168: R16.2 R19.1 U4.5(VSNS)
N17255: C34.1 U4.4(SS)
N23502: IC3.99(IO_L06N_0/PUDC_B) R46.1
N23562: IC3.1(TMS) R41.2
N23566: IC3.2(TDI) R42.2
N23576: IC3.75(TDO) R43.2
N23580: IC3.76(TCK) R45.1
N23690: IC3.27(IO_L02N_2/CSO_B) R35.1
N23749: IC3.46(IO_2/MOSI/CSI_B) R36.1
N23777: R36.2 U9.5(D)
N23943: R44.2 U9.2(Q)
N24047: R32.2 U9.3(W\)
N24069: R33.2 R35.2 U9.1(S\)
N24131: R34.1 U9.7(H\O\L\D)
N24787: R37.2 R40.1 U9.6(C)
N104745: D7.2(ANODE) R48.2
N184862: D4.2(A) R22.2
N184902: D3.2(A) R21.2
N205678: D2.2(A) R20.2
N206212: D2.1(K) IC3.98(IO_L06P_0/VREF_0)
N206548: IC3.70(IO_L05P_1) R26.1
N206550: IC3.71(IO_L05N_1) R24.1
N231911: D6.2(ANODE) R47.2
N274248: R54.1 U11.1(VCC)
N291976: D5.1(K) IC3.3(IO_L01P_3)
N292023: IC3.94(IO_L05N_0) R23.1
N292033: IC3.93(IO_L05P_0) R25.1
N292268: R28.1 XTAL1.3(OUT)
N789980: D3.1(K) IC3.73(IO_L06N_1)
N789981: D4.1(K) IC3.72(IO_L06P_1)
N2056701: D5.2(A) R27.2

Pads without a net: IC3 4 7 9 10 13 19 20 21 28 52 68 82 97; IC4 2 31 32 33; J10 3 8; U3 1 3 5 6 8; U8 1 2 3 4 5 6 7; U10 7

## Via types
v1: diameter 0.5, hole 0.3, TOP to BOTTOM, 39 vias

## Routing (per net, layer and track width the routed paths; a pad name or vN(x,y) marks a point on that pad's centre or on a via; arc(x,y) is an arc through that point)
0VCM: length 19.7
  TOP w0.203: IC1.21 65.33,83.66 65.34,83.67 66.83,83.67 68,84.84 68,90.04 64.85,93.19 60.63,93.19 60,93.82 J8.23
1VCM: length 21.4
  TOP w0.203: IC2.21 44.3,84.04 46.66,86.4 46.66,90.61 44.71,92.56 37.41,92.56 37.14,92.83 J8.5
VCC3V3: length 15.9
  TOP w0.203: L2.1 C72.1 ; C70.1 32.38,25.88 32.37,25.87 IC4.12
  TOP w0.254: IC4.40 20.41,31.32 20.22,31.14 C73.1 19.49,31.17 C74.1 ; IC4.39 21.8,31.82 21.26,32.36 21.26,33.53 20.85,33.93 C75.1 C76.1
VCC5: length 16.7
  TOP w0.381: C29.1 C28.1 49.38,18.15 47.4,16.17 L1.2
VCC12: length 7.3
  TOP w0.635: U4.2 76.77,10.19 76.86,10.27 R15.1
  TOP w1.016: R15.1 77.8,10.27 C30.1 80.14,10.3 C31.1
0AD_IN+: length 19.5
  TOP w0.203: J8.21 57.46,93.49 58.8,92.15 64.08,92.15 67.08,89.15 67.08,85.22 66.53,84.66 IC1.23
0AD_IN-: length 25
  TOP w0.203: J8.19 56.26,96.34 58.14,96.34 58.72,95.76 58.72,93.55 59.61,92.66 64.41,92.66 67.54,89.53 67.54,85.01 66.69,84.16 IC1.22
0CLK+: length 50.9
  TOP w0.203: IC1.17 65.85,81.66 R2.1 66.97,80.54 68.23,80.54 J1.1 71.88,76.89 71.88,56.13 66.88,51.13 59.79,51.13 58.27,49.61 IC3.56
0CLK-: length 47.5
  TOP w0.203: IC3.57 54.6,50.11 54.63,50.14 57.68,50.14 59.21,51.66 66.34,51.66 70.76,56.08 70.76,74.42 68.68,76.51 68.67,76.51 J1.2 66.32,78.86 66.32,78.93 R2.2 64.34,80.91 IC1.16
0CNV+: length 32.1
  TOP w0.203: v1(55.96,53.87) 55.69,53.61 IC3.64 ; J2.1 56.65,77.68 56.65,78.45 R3.2 57.73,79.53 58.59,79.53 59.97,80.91 IC1.9
  BOTTOM w0.203: J2.1 56.01,75.85 55.96,75.8 v1(55.96,53.87)
0CNV-: length 33.4
  TOP w0.203: J2.2 54.9,79.53 55.46,79.53 R3.1 56.59,80.66 57.46,80.66 58.46,81.66 IC1.8 ; v1(55.24,54.25) 54.77,54.25 54.62,54.11 IC3.65
  BOTTOM w0.203: v1(55.24,54.25) 55.24,72.36 54.21,73.4 J2.2
0D+: length 42.7
  TOP w0.203: IC1.11 61.45,78.35 61.28,78.17 R4.2 61.28,74.4 61.49,74.18 J3.1 67.36,67.41 67.36,56.26 64.62,53.52 58.57,53.52 57.17,52.11 IC3.61
0D-: length 43.2
  TOP w0.203: IC1.10 60.95,78.77 59.68,77.49 R4.1 59.68,74 J3.2 66.73,65.51 66.73,56.52 64.31,54.1 58.34,54.1 56.85,52.61 IC3.62
0DCO+: length 44.9
  TOP w0.203: IC3.59 57.84,51.11 58.95,52.22 65.84,52.22 68.91,55.3 68.91,71.48 J4.1 67.11,74.94 64.6,77.45 R5.2 64.6,78.22 64.57,78.26 64.57,78.64 63.45,79.75 IC1.15
0DCO-: length 43.5
  TOP w0.203: IC1.14 62.95,78.27 63,78.22 R5.1 63,74.84 J4.2 68.07,69.77 68.07,55.63 65.3,52.86 58.8,52.86 57.56,51.61 IC3.60
1AD_IN+: length 21.5
  TOP w0.203: IC2.23 44.33,85.04 45.72,86.44 45.72,90.3 44.42,91.59 35.76,91.59 34.6,92.76 J8.3
1AD_IN-: length 26.7
  TOP w0.203: IC2.22 44.34,84.54 46.33,86.54 46.33,90.22 44.78,91.77 44.78,92.02 44.58,92.23 37.01,92.23 35.99,93.24 35.99,95.73 35.38,96.34 33.4,96.34 J8.1
1CLK+: length 26
  TOP w0.203: IC3.77 51.42,75.96 J5.1 46.54,80.85 45.1,80.85 R7.1 43.9,82.04 IC2.17
1CLK-: length 24.3
  TOP w0.203: IC3.78 50.92,72.88 47.4,76.4 47.38,76.4 J5.2 44.55,79.23 44.45,79.23 R7.2 42.95,80.73 42.63,80.73 42.31,81.04 IC2.16
1CNV+: length 29.2
  TOP w0.203: IC2.9 38.44,81.29 37.3,80.16 37.3,79.58 R8.2 36.75,79.03 36.75,78 J6.1 34.39,75.64 34.39,74.07 38.07,70.38 41.35,70.38 45.92,65.81 IC3.88
1CNV-: length 31.4
  TOP w0.203: IC3.89 45.42,65.45 41.53,69.34 38.2,69.34 32.69,74.85 32.69,77.53 J6.2 34.84,79.68 35.14,79.68 R8.1 36.17,80.71 37.11,80.71 38.06,81.67 IC2.8
1D+: length 23.6
  TOP w0.203: IC3.85 47.42,66.57 J7.1 40.79,74.11 40.37,74.53 R9.2 40.37,76.57 39.81,77.13 IC2.11
1D-: length 25.2
  TOP w0.203: IC2.10 39.31,77.11 38.77,76.57 R9.1 38.77,74.7 38.25,74.18 J7.2 39.78,71.68 41.02,71.68 46.92,65.78 IC3.86
1DCO+: length 23.2
  TOP w0.203: IC3.83 48.42,68.01 46.46,69.98 46.46,72.22 46.41,72.27 J9.1 46.41,74.54 43.85,77.09 R10.2 43.85,77.87 43.84,77.88 43.84,78.31 41.81,80.33 IC2.15
1DCO-: length 23.2
  TOP w0.203: IC3.84 47.92,61.79 47.93,61.8 47.93,67.59 43.87,71.65 J9.2 43.87,74.52 42.25,76.14 R10.1 42.25,77.87 42.24,77.88 42.24,78.92 41.31,79.84 IC2.14
CCLK: length 3.8
  TOP w0.203: R40.2 56.6,47.99 56.48,48.11 IC3.53
CF_IN: length 53.4
  TOP w0.203: IC3.16 v1(32.77,51.61)
  BOTTOM w0.203: J8.7 30.71,86.03 30.71,53.67 v1(32.77,51.61)
CLK_IN: length 55.9
  TOP w0.203: IC3.12 v1(35.35,53.61)
  BOTTOM w0.203: v1(35.35,53.61) 32.31,56.65 32.31,82.75 42.52,92.96 47.8,92.96 J8.15
CLKOUT#: length 26.4
  TOP w0.203: IC3.40 46.92,44.43 46.91,44.42 v1(46.91,41.96)
  TOP w0.254: IC4.29 v1(28.18,36.03)
  BOTTOM w0.254: v1(46.91,41.96) 40.98,36.03 v1(28.18,36.03)
D0: length 29.5
  TOP w0.203: IC3.50 51.92,42.54 50.97,41.59 50.78,41.59 36.52,27.32 IC4.13
D1: length 28.6
  TOP w0.203: IC3.49 51.42,42.75 50.76,42.09 50.57,42.09 36.3,27.81 32.62,27.81 32.61,27.82 IC4.14
D2: length 26.8
  TOP w0.203: IC4.15 36.01,28.32 48.92,41.24 IC3.44
D3: length 26
  TOP w0.203: IC3.43 48.42,41.44 35.8,28.82 IC4.16
D4: length 25
  TOP w0.203: IC4.17 35.6,29.32 47.43,41.16 47.43,44.42 47.42,44.43 IC3.41
D5: length 22.5
  TOP w0.203: IC3.37 45.42,41.63 33.62,29.82 IC4.18
D6: length 21.7
  TOP w0.203: IC4.19 32.59,30.32 32.61,30.31 33.4,30.31 44.92,41.83 IC3.36
D7: length 20.8
  TOP w0.203: IC3.35 44.42,42.04 33.21,30.82 IC4.20
DONE: length 8.3
  TOP w0.203: IC3.54 56.51,48.61 56.72,48.82 59.89,48.82 59.91,48.84 R48.1 R39.2
EECLK: length 16.2
  TOP w0.203: IC4.44 13.09,29.32 12.97,29.44 U10.2 10.52,29.44 9.79,28.71 R50.2
EECS: length 16.3
  TOP w0.203: IC4.45 22.25,28.82 22.25,28.83 20.65,28.83 19.99,28.17 U10.1 11.97,26.12 10.77,24.92 R49.2
EEDATA: length 11.6
  TOP w0.203: U10.3 14.78,30.71 14.79,30.72 R51.1 16.88,30.72 17.78,29.82 IC4.43
EN0: length 52.6
  TOP w0.203: IC1.4 v1(58.67,83.66) ; IC2.4 v1(36.37,84.04) 35.61,84.04 30.58,79.02 30.58,74.83 37.59,67.82 41.1,67.82 41.83,67.08 R23.2
  BOTTOM w0.203: v1(36.37,84.04) 52,84.04 52.38,83.66 v1(58.67,83.66)
EN1: length 51.1
  TOP w0.203: IC1.5 v1(58.09,83.16) ; IC2.5 37.12,83.54 37.11,83.54 v1(36.96,83.54) 36.02,83.54 31.29,78.82 31.29,75.18 37.97,68.5 41.36,68.5 43,66.86 R25.2
  BOTTOM w0.203: v1(36.96,83.54) 51.77,83.54 52.14,83.16 v1(58.09,83.16)
EN2: length 55
  TOP w0.203: v1(36.35,83.05) 37.16,83.05 37.16,83.04 IC2.6 ; IC1.6 v1(58.67,82.66) ; R24.2 v1(62.94,56.87)
  BOTTOM w0.203: v1(62.94,56.87) 62.94,66.42 57.84,71.53 57.84,74.78 58.67,75.62 v1(58.67,82.66) 51.83,82.66 51.44,83.05 v1(36.35,83.05)
EN3: length 54.1
  TOP w0.203: v1(62.31,55.5) 62.28,55.52 R26.2 ; IC2.7 v1(36.93,82.54) ; IC1.7 v1(58.12,82.16)
  BOTTOM w0.203: v1(62.31,55.5) 62.31,65.58 57.2,70.69 57.2,75.46 58.12,76.38 v1(58.12,82.16) 51.52,82.16 51.14,82.54 v1(36.93,82.54)
FT_RST: length 48.5
  TOP w0.203: IC3.39 46.42,44.43 46.41,44.42 v1(46.41,42.42)
  TOP w0.254: v1(26.64,36.91) 25.69,36.91 R58.2 25.68,34.28 IC4.34
  BOTTOM w0.254: R54.2 33.71,20 26.64,27.06 v1(26.64,36.91) 32.16,42.42 v1(46.41,42.42)
INIT_B: length 5.5
  TOP w0.203: D6.1 v1(50.9,40.89) ; v1(50.9,43.46) 50.9,44.41 50.92,44.43 IC3.48
  BOTTOM w0.203: v1(50.9,40.89) v1(50.9,43.46)
M0: length 7.3
  TOP w0.203: R31.2 37.24,47.12 37.24,47.11 IC3.25
M1: length 7.5
  TOP w0.203: R30.2 33.07,48.31 33.77,47.61 IC3.24
M2: length 7.8
  TOP w0.203: IC3.23 37.24,48.11 37.24,48.11 36.09,48.11 34.7,49.5 R29.2
MISO: length 39.2
  TOP w0.203: v1(53.62,43.94) 53.62,46.73 53.62,46.73 IC3.51
  BOTTOM w0.203: R44.1 27.94,46.61 30.61,43.94 53.12,43.94 53.12,43.94 v1(53.62,43.94)
PROG_B: length 18.2
  TOP w0.203: IC3.100 39.92,61.79 39.53,62.18 37.08,62.18 35.74,63.52 R38.2 35.01,64.2 34.99,64.22 S1.3 S1.1
PWRSAV#: length 20.3
  TOP w0.203: IC4.30 27.68,36.37 34.09,42.77 40.01,42.77 41.42,44.19 IC3.29
RD#: length 19.6
  TOP w0.203: IC4.26 29.68,35.46 35.49,41.27 40.58,41.27 42.92,43.61 IC3.32
REFIN0: length 3.2
  TOP w0.203: IC1.3 59.08,84.16 59.06,84.15 58.34,84.15 58.06,84.43 R1.1
REFIN1: length 3.5
  TOP w0.203: R6.1 37.19,84.79 37.44,84.54 IC2.3
RST_IN: length 52.6
  TOP w0.203: IC3.15 v1(34.07,52.11)
  BOTTOM w0.203: v1(34.07,52.11) 31.39,54.79 31.39,84.17 J8.9
RXF#: length 20
  TOP w0.203: IC3.34 43.92,42.25 33.02,31.34 32.63,31.34 32.61,31.32 IC4.21
SIWU#: length 19.6
  TOP w0.203: IC3.30 41.92,44.06 40.13,42.27 35.08,42.27 28.68,35.87 IC4.28
TCK: length 64.6
  TOP w0.203: R45.2 v1(53.7,61.57) ; v1(36.07,54.74) 7.65,54.74 3.89,50.98 3.89,47.65 1.91,45.67
  BOTTOM w0.203: v1(36.07,54.74) 36.07,60.53 37.11,61.57 v1(53.7,61.57)
TDI: length 30.3
  TOP w0.203: R42.1 v1(28.8,59.21)
  BOTTOM w0.203: 1.91,53.29 5.28,56.67 18.24,56.67 20.78,59.21 v1(28.8,59.21)
TDO: length 63.3
  TOP w0.203: v1(35.28,55.42) 6.58,55.42 1.91,50.75 ; v1(54.56,62.15) 55.04,62.15 55.05,62.17 R43.1
  BOTTOM w0.203: v1(35.28,55.42) 35.28,61.09 36.35,62.15 v1(54.56,62.15)
TMS: length 28.7
  TOP w0.203: R41.1 v1(28.8,60.4)
  BOTTOM w0.203: v1(28.8,60.4) 20.55,60.4 18.57,58.42 2.98,58.42 2.93,58.37 1.91,58.37
TRIG0_FPGA: length 22.8
  TOP w0.203: IC3.6 23.91,56.61 20.29,60.22 U8.8
TRIG0_OUT: length 59.7
  TOP w0.203: U8.9 v1(18.62,61.49)
  BOTTOM w0.203: J8.13 46.03,96.27 28.88,96.27 18.62,86 v1(18.62,61.49)
TRIG1_FPGA: length 24.7
  TOP w0.203: U8.11 19.43,64.03 21.82,61.65 21.82,60.66 25.36,57.11 IC3.5
TRIG1_OUT: length 43.4
  TOP w0.254: J8.2 25.2,97.54 20.82,93.15 20.82,67.7 18.41,65.3 U8.12
TXE#: length 19.6
  TOP w0.203: IC4.25 30.18,35.25 30.98,36.05 30.98,36.05 35.7,40.77 40.74,40.77 43.42,43.45 IC3.33
WR#: length 19.6
  TOP w0.203: IC3.31 42.42,43.77 40.42,41.77 35.28,41.77 29.18,35.66 IC4.27
XTAIL2_OUT: length 5.4
  TOP w0.203: IC3.90 44.92,62.85 v1(44.42,63.35)
  BOTTOM w0.203: v1(44.42,63.35) C45.1 R28.2
N07006: length 6.7
  TOP w0.203: IC4.8 28.18,24.89 28.95,24.12 28.95,23.64 29.57,23.02 C66.1 C67.1 L2.2
N07019: length 6.2
  TOP w0.203: IC4.3 25.68,25.02 24.31,23.65 C68.1 C69.1 L3.2
N07539: length 5.7
  TOP w0.203: IC4.38 22.18,32.32 21.97,32.54 C78.1
N07557: length 4.1
  TOP w0.203: IC4.37 23.23,33.2 23.22,33.22 C77.1
N09249: length 3
  TOP w0.203: R53.2 26.8,24.51 27.18,24.89 IC4.6
N09253: length 3
  TOP w0.203: IC4.7 27.68,24.89 28.04,24.54 R55.2
N09257: length 12.9
  TOP w0.203: U11.2 28.68,14.81 28.27,14.4 26.49,14.4 26.06,14.83 26.06,16.21 26.8,16.94 R53.1
N09261: length 13
  TOP w0.203: U11.3 32.69,13.74 32.69,15.8 32,16.48 28.47,16.48 28.04,16.92 R55.1
N09333: length 18.9
  TOP w0.508: C79.2 R57.2 23.61,10.09 23.62,10.1 U11.M1
  BOTTOM w0.762: U11.M2 U11.M1
N09549: length 3.4
  TOP w0.203: IC4.5 26.68,24.89 25.53,23.74 R56.2
N10001: length 3.4
  TOP w0.203: R59.1 15.95,21.67 15.93,21.68 XTAL2.3
N10014: length 11.5
  TOP w0.203: C80.1 18.21,19.84 18.22,19.86 R59.2 18.22,23.08 21.03,25.88 24.29,25.88 24.3,25.87 IC4.1
N10649: length 6.2
  TOP w0.203: R51.2 15.52,33.2 14.97,33.74 R52.2 12.71,33.74 12.67,33.71 12.29,33.71 11.97,33.38 U10.4
N14805: length 4.7
  TOP w0.203: U1.4 86.03,48.29 85.69,47.94 R11.2 84.23,47.26 84.25,47.24 R13.1
N15646: length 5.2
  TOP w0.203: R12.2 85.74,61.1 86.11,61.47 U2.4 87.27,60.93 86.68,60.34 R14.1
N16666: length 6.1
  TOP w0.203: R18.1 79.25,12.4 78.73,11.87 R15.2 76.64,11.87 76.23,11.46 U4.3
N16724: length 5.4
  TOP w0.203: U4.1 74.89,7.63 74.17,6.91 C27.1
N16752: length 18
  TOP w0.381: D1.1 69.51,6.09 69.51,6.09 C27.2 69.51,7.73 69.49,7.75 U4.8 61.11,8.92 60.38,8.18 L1.1
N17090: length 5.6
  TOP w0.203: C33.1 65.32,12.16 65.33,12.15 C32.1 68.47,11.47 68.48,11.46 U4.6
N17111: length 1.6
  TOP w0.203: C33.2 63.72,11.73 R17.1
N17168: length 6
  TOP w0.203: R16.2 R19.1 66.37,14.22 67.87,12.73 U4.5
N17255: length 3.3
  TOP w0.203: U4.4 75.89,12.73 76.84,13.68 C34.1
N23502: length 6.1
  TOP w0.203: IC3.99 40.42,62.37 39.85,62.94 37.66,62.94 37.08,63.52 R46.1
N23562: length 7.4
  TOP w0.203: R41.2 32.54,60.4 33.83,59.11 IC3.1
N23566: length 7.1
  TOP w0.203: R42.2 33.22,59.21 33.82,58.61 IC3.2
N23576: length 4.2
  TOP w0.203: R43.2 57.15,60.57 55.7,59.11 IC3.75
N23580: length 4.6
  TOP w0.203: IC3.76 51.92,63.25 52.78,64.11 53.68,64.11 R45.1
N23690: length 23.8
  TOP w0.203: IC3.27 40.42,44.28 v1(39.6,43.46)
  BOTTOM w0.203: v1(39.6,43.46) 29.44,43.46 27.84,45.06 R35.1
N23749: length 27.1
  TOP w0.203: v1(49.94,42.95) 49.94,44.42 49.92,44.43 IC3.46 ; R36.1 v1(26.75,44.07)
  BOTTOM w0.203: v1(49.94,42.95) 27.86,42.95 v1(26.75,44.07)
N23777: length 2.8
  TOP w0.203: U9.5 R36.2
N23943: length 5.6
  TOP w0.203: U9.2 v1(12.88,46.61)
  BOTTOM w0.203: v1(12.88,46.61) R44.2
N24047: length 2.5
  TOP w0.203: R32.2 U9.3
N24069: length 7.8
  TOP w0.203: v1(15.95,45.06) 15.95,47.35 15.42,47.88 U9.1 R33.2
  BOTTOM w0.203: v1(15.95,45.06) R35.2
N24131: length 2.8
  TOP w0.203: U9.7 R34.1
N24787: length 41.6
  TOP w0.203: v1(57.33,44.42) R40.1 59.9,46.39 59.91,46.41 R37.2 ; U9.6 v1(32.94,45.34)
  BOTTOM w0.203: v1(32.94,45.34) 33.86,44.42 56.7,44.42 56.7,44.42 v1(57.33,44.42)
N104745: length 1.2
  TOP w0.203: D7.2 R48.2
N184862: length 1.3
  TOP w0.203: D4.2 R22.2
N184902: length 1.3
  TOP w0.203: D3.2 R21.2
N205678: length 1.5
  TOP w0.203: R20.2 D2.2
N206212: length 3.8
  TOP w0.203: D2.1 39.98,64.2 40.92,63.26 40.92,62.87 40.92,62.86 IC3.98
N206548: length 6.7
  TOP w0.203: R26.1 57.58,55.52 56.49,56.61 IC3.70
N206550: length 6.3
  TOP w0.203: R24.1 56.95,56.87 56.71,57.11 IC3.71
N231911: length 1.4
  TOP w0.203: D6.2 R47.2
N274248: length 3.6
  BOTTOM w0.254: U11.1 R54.1
N291976: length 6.9
  TOP w0.203: IC3.3 37.24,58.11 37.15,58.01 D5.1
N292023: length 4.2
  TOP w0.203: R23.1 41.83,63.9 42.92,62.81 IC3.94
N292033: length 3.9
  TOP w0.203: R25.1 43,63.37 43.41,62.97 43.41,61.8 43.42,61.79 IC3.93
N292268: length 2.8
  BOTTOM w0.203: XTAL1.3 47.7,66.16 47.69,66.15 R28.1
N789980: length 6.9
  TOP w0.203: D3.1 58.32,59.72 56.71,58.11 IC3.73
N789981: length 6.5
  TOP w0.203: D4.1 58.6,58.29 57.92,57.61 IC3.72
N2056701: length 1.8
  TOP w0.203: R27.2 D5.2
